# Altium PCB SensorBoardShield_Actuator.PcbDoc (part 2 of 2)
Units mil, origin at the board's own origin, x right, y up, seen from the top; angles counter-clockwise.
Board outline 3258.19 x 2440.94 mil, 4 copper layers (Top Layer, GND, PWR, Bottom Layer), stack 22.373 mil thick; 64 components, 36 nets, 228 pads, 1194 vias.
Unrouted connection lines stored in the file: 70.
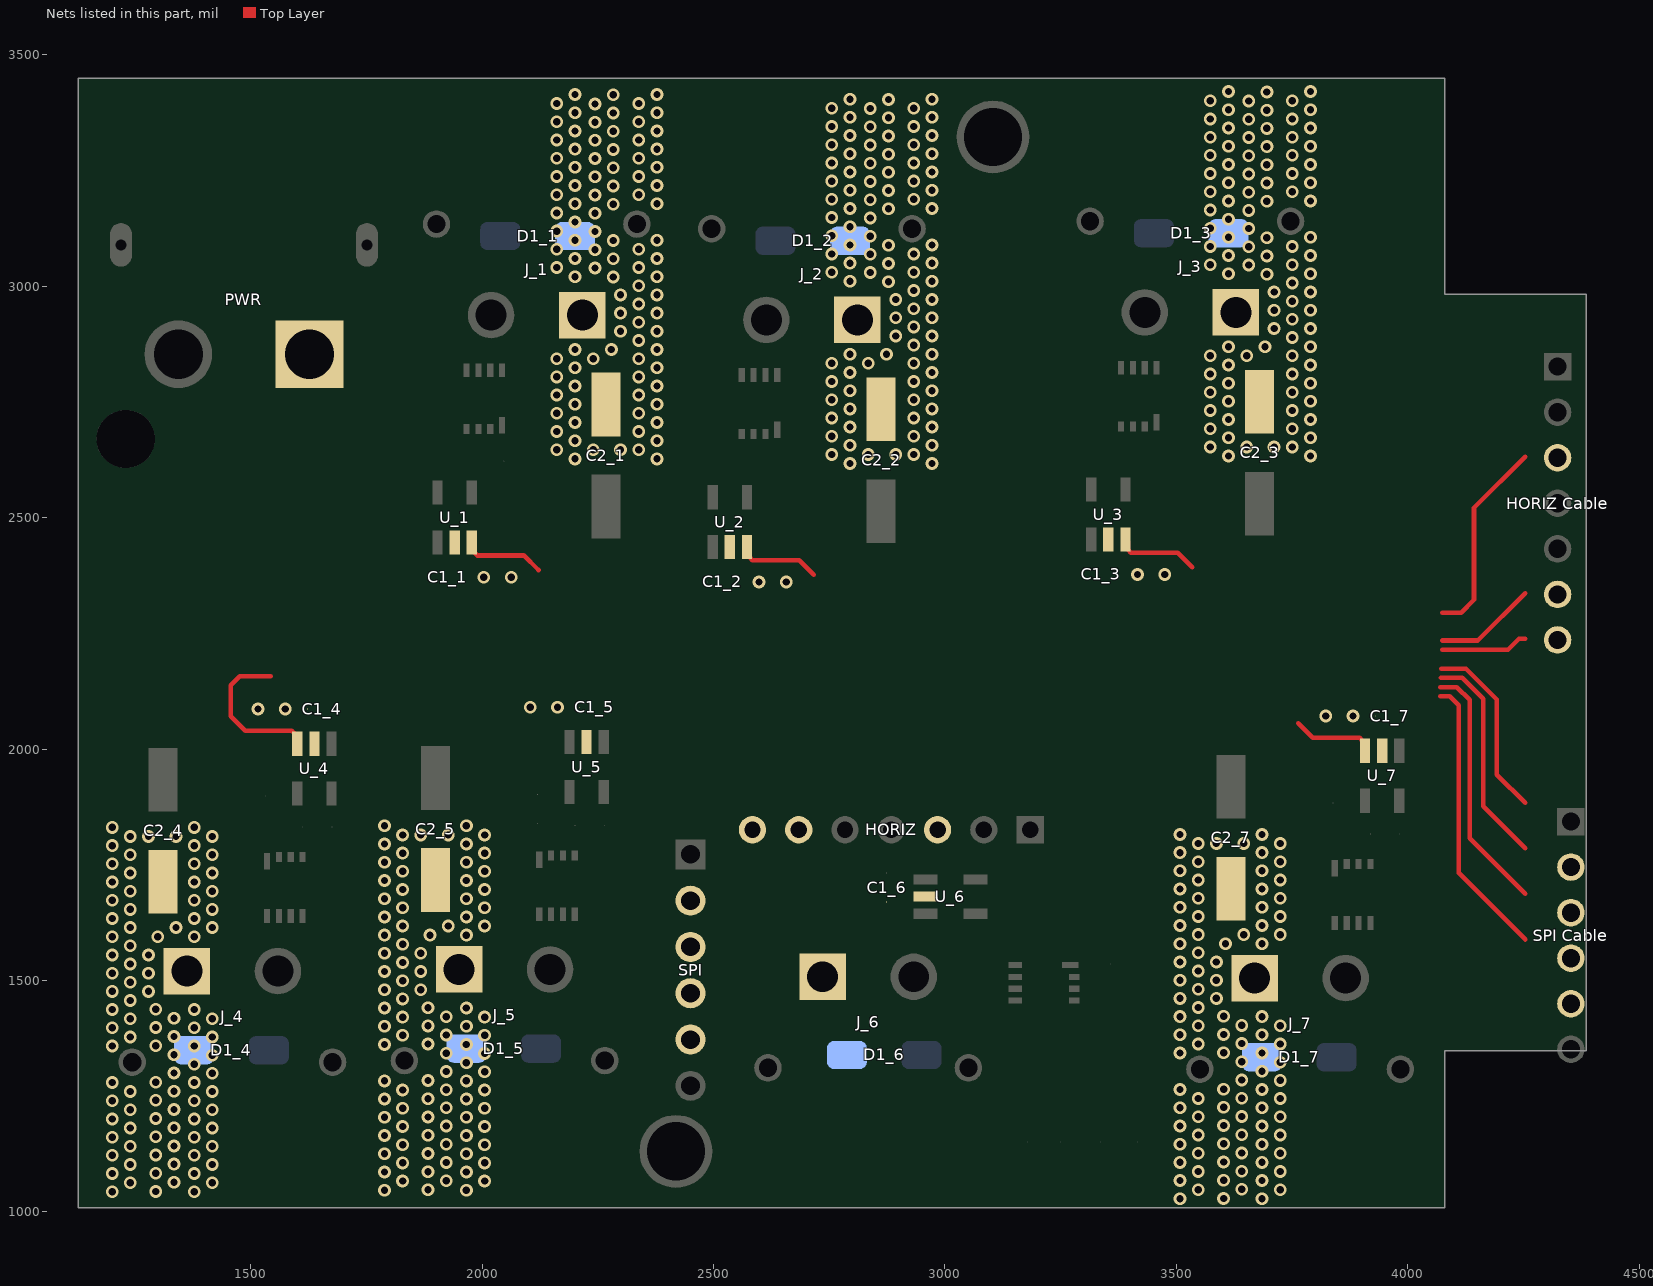
[diagram p3: the nets of this part, all layers, seen from the top]

## Via types
v1: diameter 27.56, hole 15.75, Top Layer to Bottom Layer, 1181 vias
v2: diameter 24, hole 12, Top Layer to Bottom Layer, 13 vias

## Nets (pads, with @x,y where several pads share a name; then routed paths per layer and width w, separated by ;. In a path a pad name is that pad's centre, name@x,y a point inside that pad or via, vN(x,y) a via of type N, cw(c..) or ccw(c..) an arc to the next point about the centre after c; other vN are vias at no path point) (continued)
S2: "HORIZ Cable.6" HORIZ.6 U_7.3 | length 399.5
  Top Layer w10: 3763.94,2055.71 3795.43,2024.21 3896.18,2024.21 3902.04,2018.35 3902.04,2002.32 U_7.3@3908.04,1996.32 ; 4074.8,2234.57 4151.89,2234.57 4253.94,2336.61
S3: "HORIZ Cable.7" HORIZ.7 | length 188.9
  Top Layer w10: 4074.8,2214.57 4216.96,2214.57 4240.58,2238.19 4253.94,2238.19
SCK: "SPI Cable.3" SPI.3 U_2.3 | length 648.6
  Top Layer w10: U_2.3@2572.43,2436.11 2578.43,2430.11 2578.43,2414.08 2584.29,2408.22 2685.04,2408.22 2716.54,2376.72 ; 4072.07,2153.86 4117.8,2153.86 4163.39,2108.27 4163.39,1875.98 4253.94,1785.43
SDI: "SPI Cable.4" SPI.4 U_3.3 | length 721.8
  Top Layer w10: U_3.3@3390.23,2452.38 3396.23,2446.38 3396.23,2430.34 3402.09,2424.49 3502.83,2424.49 3534.33,2392.99 ; 4070.62,2133.86 4106.3,2133.86 4133.86,2106.3 4133.86,1807.09 4253.94,1687.01
SDO: "SPI Cable.5" SPI.5 | length 612.8
  Top Layer w10: 4070.87,2113.86 4070.94,2113.79 4090.94,2113.79 4110.24,2094.49 4110.24,1732.28 4253.94,1588.58
SISI: "SPI Cable.2" SPI.2 U_1.3 | length 574.8
  Top Layer w10: U_1.3@1977.95,2446.2 1983.95,2440.2 1983.95,2424.16 1989.8,2418.31 2090.55,2418.31 2122.05,2386.81 ; 4072.3,2173.86 4126.08,2173.86 4192.91,2107.02 4192.91,1944.88 4253.94,1883.86
TCK: "HORIZ Cable.3" HORIZ.3 U_4.3 | length 775.1
  Top Layer w10: 1543.31,2157.48 1476.38,2157.48 1456.69,2137.8 1456.69,2070.87 1488.19,2039.37 1588.94,2039.37 1594.8,2033.51 1594.8,2017.48 U_4.3@1600.8,2011.48 ; 4074.8,2294.57 4115.43,2294.57 4143.39,2322.52 4143.39,2521.34 4253.94,2631.89
VCC-12V: C1_1.2 C1_2.2 C1_3.2 C1_4.2 C1_5.2 C1_6.2 C1_7.2 C2_1.1 C2_2.1 C2_3.1 C2_4.1 C2_5.1 C2_7.1 D1_1.1 D1_2.1 D1_3.1 D1_4.1 D1_5.1 D1_6.1 D1_7.1 J_1.P J_2.P J_3.P J_4.P J_5.P J_6.P J_7.P PWR.2 U_1.2 U_2.2 U_3.2 U_4.2 U_5.2 U_6. U_7.2
  other v1: 3508.03,1028.15 3685.2,1028.15 3602.38,1028.9 1200.79,1043.31 1377.95,1043.31 1295.13,1044.05 1789.06,1046.75 1883.4,1047.5 1966.22,1046.75 3547.4,1047.83 3724.57,1047.83 3641.75,1048.58 1240.16,1062.99 1417.32,1062.99 1334.5,1063.74 1828.43,1066.44 2005.59,1066.44 1922.77,1067.18 3508.03,1067.52 3602.38,1068.27 3685.2,1067.52 1200.79,1082.68 1295.13,1083.42 1377.95,1082.68 1789.06,1086.12 1966.22,1086.12 1883.4,1086.87 3547.4,1087.2 3724.57,1087.2 3641.75,1087.95 1240.16,1102.36 1417.32,1102.36 1334.5,1103.11 1828.43,1105.81 2005.59,1105.81 1922.77,1106.55 3508.03,1106.89 3685.2,1106.89 3602.38,1107.64 1200.79,1122.05 1377.95,1122.05 1295.13,1122.79 1789.06,1125.49 1966.22,1125.49 1883.4,1126.24 3547.4,1126.57 3641.75,1127.32 3724.57,1126.57 1240.16,1141.73 1334.5,1142.48 1417.32,1141.73 1828.43,1145.18 2005.59,1145.18 1922.77,1145.92 3508.03,1146.26 3685.2,1146.26 3602.38,1147.01 1200.79,1161.42 1377.95,1161.42 1295.13,1162.16 1789.06,1164.86 1966.22,1164.86 1883.4,1165.61 3547.4,1165.94 3724.57,1165.94 3641.75,1166.69 1240.16,1181.1 1417.32,1181.1 1334.5,1181.85 1828.43,1184.55 1922.77,1185.29 2005.59,1184.55 3508.03,1185.63 3602.38,1186.38 3685.2,1185.63 1200.79,1200.79 1377.95,1200.79 1295.13,1201.53 1789.06,1204.23 1966.22,1204.23 1883.4,1204.98 3547.4,1205.31 3724.57,1205.31 3641.75,1206.06 1240.16,1220.47 1417.32,1220.47 1334.5,1221.22 1828.43,1223.92 2005.59,1223.92 1922.77,1224.66 3508.03,1225 3685.2,1225 3602.38,1225.75 1200.79,1240.16 1377.95,1240.16 1295.13,1240.9 1789.06,1243.6 1883.4,1244.35 1966.22,1243.6 3547.4,1244.68 3641.75,1245.43 3724.57,1244.68 1240.16,1259.84 1417.32,1259.84 1334.5,1260.59 1828.43,1263.29 2005.59,1263.29 1922.77,1264.03 3508.03,1264.37 3685.2,1264.37 3602.38,1265.12 1200.79,1279.53 1295.13,1280.27 1377.95,1279.53 1789.06,1282.97 1966.22,1282.97 1883.4,1283.72 3724.57,1284.06 3641.75,1284.8 1417.32,1299.21 1334.5,1299.96 1922.77,1303.4 2005.59,1302.66 3685.2,1303.74 1377.95,1318.9 1966.22,1322.34 3724.57,1323.43 3641.75,1324.17 1334.5,1339.33 1417.32,1338.58 2005.59,1342.03 1922.77,1342.77 3508.03,1343.11 3685.2,1343.11 3602.38,1343.86 1200.79,1358.27 1377.95,1358.27 1295.13,1359.01 1789.06,1361.71 1883.4,1362.46 1966.22,1361.71 3547.4,1362.8 3724.57,1362.8 3641.75,1363.54 1240.16,1377.95 1417.32,1377.95 1334.5,1378.7 1828.43,1381.4 2005.59,1381.4 1922.77,1382.15 3508.03,1382.48 3685.2,1382.48 3602.38,1383.23 1200.79,1397.64 1295.13,1398.38 1377.95,1397.64 1789.06,1401.08 1966.22,1401.08 1883.4,1401.83 3547.4,1402.17 3724.57,1402.17 3641.75,1402.91 1240.16,1417.32 1417.32,1417.32 1334.5,1418.07 1828.43,1420.77 2005.59,1420.77 1922.77,1421.52 3508.03,1421.85 3685.2,1421.85 3602.38,1422.6 1200.79,1437.01 1377.95,1437.01 1295.13,1437.75 1789.06,1440.45 1966.22,1440.45 1883.4,1441.2 3547.4,1441.54 1240.16,1456.69 1828.43,1460.14 3508.03,1461.22 3586.77,1461.22 1200.79,1476.38 1279.53,1476.38 1789.06,1479.82 1867.8,1479.82 3547.4,1480.91 1240.16,1496.06 1828.43,1499.51 3508.03,1500.59 3586.77,1500.59 1200.79,1515.75 1279.53,1515.75 1789.06,1519.19 1867.8,1519.19 3547.4,1520.28 1240.16,1535.43 1828.43,1538.88 3508.03,1539.96 3586.77,1539.96 1200.79,1555.12 1279.53,1555.12 1789.06,1558.56 1867.8,1558.56 3547.4,1559.65 1240.16,1574.8 1828.43,1578.25 3508.03,1579.33 3606.46,1579.33 3685.2,1579.33 1200.79,1594.49 1299.21,1594.49 1377.95,1594.49 1789.06,1597.93 1887.48,1597.93 1966.22,1597.93 3547.4,1599.02 3645.83,1599.02 3724.57,1599.02 1240.16,1614.17 1338.58,1614.17 1417.32,1614.17 1828.43,1617.62 1926.85,1617.62 2005.59,1617.62 3508.03,1618.7 3685.2,1618.7 1200.79,1633.86 1377.95,1633.86 1789.06,1637.3 1966.22,1637.3 3547.4,1638.39 3724.57,1638.39 1240.16,1653.54 1417.32,1653.54 1828.43,1656.99 2005.59,1656.99 3508.03,1658.07 3685.2,1658.07 1200.79,1673.23 1377.95,1673.23 1789.06,1676.67 1966.22,1676.67 3547.4,1677.76 3724.57,1677.76 1240.16,1692.91 1417.32,1692.91 1828.43,1696.36 2005.59,1696.36 3508.03,1697.44 3685.2,1697.44 1200.79,1712.6 1377.95,1712.6 1789.06,1716.04 1966.22,1716.04 3547.4,1717.13 3724.57,1717.13 1240.16,1732.28 1417.32,1732.28 1828.43,1735.73 2005.59,1735.73 3508.03,1736.81 3685.2,1736.81 1200.79,1751.97 1377.95,1751.97 1789.06,1755.41 1966.22,1755.41 3547.4,1756.5 3724.57,1756.5 1240.16,1771.65 1417.32,1771.65 1828.43,1775.1 2005.59,1775.1 3508.03,1776.18 3685.2,1776.18 1200.79,1791.34 1377.95,1791.34 1789.06,1794.78 1966.22,1794.78 3547.4,1795.87 3586.77,1795.87 3645.83,1795.87 3724.57,1795.87 1240.16,1811.02 1279.53,1811.02 1338.58,1811.02 1417.32,1811.02 1828.43,1814.47 1867.8,1814.47 1926.85,1814.47 2005.59,1814.47 3508.03,1815.55 3685.2,1815.55 1200.79,1830.71 1377.95,1830.71 1789.06,1834.15 1966.22,1834.15 3822.99,2071.46 3882.05,2071.46 1515.75,2086.61 1574.8,2086.61 2104.02,2090.06 2163.07,2090.06 2598.43,2360.97 2657.48,2360.97 2003.94,2371.06 2062.99,2371.06 3416.22,2377.24 3475.28,2377.24 2795.28,2616.88 2972.44,2616.88 2200.79,2626.97 2377.95,2626.97 3613.07,2633.15 3790.24,2633.15 2755.91,2636.56 2834.65,2636.56 2893.7,2636.56 2933.07,2636.56 2161.42,2646.65 2240.16,2646.65 2299.21,2646.65 2338.58,2646.65 3573.7,2652.83 3652.44,2652.83 3711.5,2652.83 3750.87,2652.83 2795.28,2656.25 2972.44,2656.25 2200.79,2666.34 2377.95,2666.34 3613.07,2672.52 3790.24,2672.52 2755.91,2675.93 2933.07,2675.93 2161.42,2686.02 2338.58,2686.02 3573.7,2692.2 3750.87,2692.2 2795.28,2695.62 2972.44,2695.62 2200.79,2705.71 2377.95,2705.71 3613.07,2711.89 3790.24,2711.89 2755.91,2715.3 2933.07,2715.3 2161.42,2725.39 2338.58,2725.39 3573.7,2731.57 3750.87,2731.57 2795.28,2734.99 2972.44,2734.99 2200.79,2745.08 2377.95,2745.08 3613.07,2751.26 3790.24,2751.26 2755.91,2754.67 2933.07,2754.67 2161.42,2764.76 2338.58,2764.76 3573.7,2770.94 3750.87,2770.94 2795.28,2774.36 2972.44,2774.36 2200.79,2784.45 2377.95,2784.45 3613.07,2790.63 3790.24,2790.63 2755.91,2794.04 2933.07,2794.04 2161.42,2804.13 2338.58,2804.13 3573.7,2810.31 3750.87,2810.31 2795.28,2813.73 2972.44,2813.73 2200.79,2823.82 2377.95,2823.82 3613.07,2830 3790.24,2830 2755.91,2833.41 2834.65,2833.41 2933.07,2833.41 2161.42,2843.5 2240.16,2843.5 2338.58,2843.5 3573.7,2849.68 3652.44,2849.68 3750.87,2849.68 2795.28,2853.1 2874.02,2853.1 2972.44,2853.1 2200.79,2863.19 2279.53,2863.19 2377.95,2863.19 3613.07,2869.37 3691.81,2869.37 3790.24,2869.37 2933.07,2872.78 2338.58,2882.87 3750.87,2889.05 2893.7,2892.47 2972.44,2892.47 2299.21,2902.56 2377.95,2902.56 3711.5,2908.74 3790.24,2908.74 2933.07,2912.16 2338.58,2922.24 3750.87,2928.42 2893.7,2931.84 2972.44,2931.84 2299.21,2941.93 2377.95,2941.93 3711.5,2948.11 3790.24,2948.11 2933.07,2951.53 2338.58,2961.61 3750.87,2967.79 2893.7,2971.21 2972.44,2971.21 2299.21,2981.3 2377.95,2981.3 3711.5,2987.48 3790.24,2987.48 2933.07,2990.9 2338.58,3000.98 3750.87,3007.16 2878.09,3009.83 2795.28,3010.58 2972.44,3010.58 2283.61,3019.92 2200.79,3020.67 2377.95,3020.67 3695.89,3026.1 3613.07,3026.85 3790.24,3026.85 2755.91,3030.27 2838.72,3029.52 2933.07,3030.27 2161.42,3040.35 2244.24,3039.61 2338.58,3040.35 3656.52,3045.79 3573.7,3046.53 3750.87,3046.53 2878.09,3049.2 2795.28,3049.95 2972.44,3049.95 2283.61,3059.29 2200.79,3060.04 2377.95,3060.04 3695.89,3065.47 3613.07,3066.22 3790.24,3066.22 2838.72,3068.89 2755.91,3069.64 2933.07,3069.64 2244.24,3078.98 2161.42,3079.72 2338.58,3079.72 3656.52,3085.16 3573.7,3085.9 3750.87,3085.9 2795.28,3089.32 2878.09,3088.57 2972.44,3089.32 2200.79,3099.41 2283.61,3098.66 2377.95,3099.41 3695.89,3104.84 3613.07,3105.59 3790.24,3105.59 2838.72,3108.26 2755.91,3109.01 2244.24,3118.35 2161.42,3119.09 3573.7,3125.27 3656.52,3124.53 2795.28,3128.69 2200.79,3138.78 3613.07,3144.96 2755.91,3148.38 2838.72,3147.63 2161.42,3158.46 2244.24,3157.72 3656.52,3163.9 3573.7,3164.64 2878.09,3167.31 2795.28,3168.06 2972.44,3168.06 2283.61,3177.4 2200.79,3178.15 2377.95,3178.15 3613.07,3184.33 3695.89,3183.58 3790.24,3184.33 2838.72,3187 2755.91,3187.75 2933.07,3187.75 2244.24,3197.09 2161.42,3197.83 2338.58,3197.83 3656.52,3203.27 3573.7,3204.01 3750.87,3204.01 2795.28,3207.43 2878.09,3206.68 2972.44,3207.43 2283.61,3216.77 2200.79,3217.52 2377.95,3217.52 3695.89,3222.95 3613.07,3223.7 3790.24,3223.7 2838.72,3226.37 2755.91,3227.12 2933.07,3227.12 2244.24,3236.46 2161.42,3237.2 2338.58,3237.2 3573.7,3243.38 3656.52,3242.64 3750.87,3243.38 2878.09,3246.05 2795.28,3246.8 2972.44,3246.8 2283.61,3256.14 2200.79,3256.89 2377.95,3256.89 3695.89,3262.32 3613.07,3263.07 3790.24,3263.07 2755.91,3266.49 2838.72,3265.74 2933.07,3266.49 2244.24,3275.83 2161.42,3276.57 2338.58,3276.57 3656.52,3282.01 3573.7,3282.75 3750.87,3282.75 2878.09,3285.42 2795.28,3286.17 2972.44,3286.17 2200.79,3296.26 2283.61,3295.51 2377.95,3296.26 3613.07,3302.44 3695.89,3301.69 3790.24,3302.44 2838.72,3305.11 2755.91,3305.86 2933.07,3305.86 2244.24,3315.2 2161.42,3315.95 2338.58,3315.95 3656.52,3321.38 3573.7,3322.12 3750.87,3322.12 2878.09,3324.79 2795.28,3325.54 2972.44,3325.54 2283.61,3334.88 2200.79,3335.63 2377.95,3335.63 3695.89,3341.06 3613.07,3341.81 3790.24,3341.81 2838.72,3344.48 2755.91,3345.23 2933.07,3345.23 2161.42,3355.32 2244.24,3354.57 2338.58,3355.32 3573.7,3361.49 3656.52,3360.75 3750.87,3361.5 2878.09,3364.16 2795.28,3364.91 2972.44,3364.91 2283.61,3374.25 2200.79,3375 2377.95,3375 3695.89,3380.43 3613.07,3381.18 3790.24,3381.18 2838.72,3383.85 2755.91,3384.6 2933.07,3384.6 2244.24,3393.94 2161.42,3394.69 2338.58,3394.69 3656.52,3400.12 3573.7,3400.86 3750.87,3400.87 2795.28,3404.28 2878.09,3403.53 2972.44,3404.28 2200.79,3414.37 2283.61,3413.62 2377.95,3414.37 3695.89,3419.8 3613.07,3420.55 3790.24,3420.55
pads on no net: J_1.S1 J_1.S2 J_2.S1 J_2.S2 J_3.S1 J_3.S2 J_4.S1 J_4.S2 J_5.S1 J_5.S2 J_6.S1 J_6.S2 J_7.S1 J_7.S2 PWR.S1 PWR.S2

## Polygon pours and split planes (outlines as drawn)
GND on Top Layer "GND_L01_P120" (solid, pour order 120): 3020,1660 3230,1660 3230,1585 3020,1585
NetR1_6_1 on Top Layer "NETR1_6_1_L01_P119" (solid, pour order 119): 3385,1765 3385,1675 3020,1675 3020,1765
NetQ_7_4 on Top Layer "NETQ_7_4_L01_P041" (solid, pour order 41): 3763.94,1728.94 3771.81,1721.06 3850.55,1721.06 3850.55,1787.99 3858.43,1795.87 3941.1,1795.87 3941.1,1839.17 3771.81,1839.17 3763.94,1831.3
NetR1_7_1 on Top Layer "NETR1_7_1_L01_P047" (solid, pour order 47): 3966.5,1953.39 3966.5,1795.87 4042.48,1795.87 4042.48,1953.39
GND on Top Layer "GND_L01_P053" (solid, pour order 53): 3922.4,1917.42 3922.4,1852.46 3483.43,1852.46 3483.43,2098.52 3688.15,2098.52 3818.07,1968.6 3866.3,1968.6
GND on Top Layer "GND_L01_P065" (solid, pour order 65): 3968.66,2099.02 3968.66,1969.09 4045.43,1969.09 4045.43,2099.02
GND on Top Layer "GND_L01_P077" (solid, pour order 77): 3952.91,1719.59 3860,1719.59 3860,1780 4045,1780 4044.45,1779.45 4044.45,1618.7 3952.91,1618.7
VCC-12V on Top Layer "VCC-12V_L01_P083" (solid, pour order 83): 3803.31,2099.02 3803.31,2041.44 3919.94,2041.44 3934.21,2027.17 3934.21,1970.57 3956.85,1970.57 3956.85,2099.02
NetR1_7_1 on Top Layer "NETR1_7_1_L01_P089" (solid, pour order 89): 3966.69,1853.44 3933.23,1853.44 3933.23,1922.34 3933.23,1953.35 3966.69,1953.35
VCC-12V on Top Layer "VCC-12V_L01_P101" (solid, pour order 101): 3743.53,1005.02 3487.36,1005.02 3487.36,1831.79 3748.68,1831.79
NetD1_7_2 on Top Layer "NETD1_7_2_L01_P122" (solid, pour order 122): 3765,1010 4025,1010 4025,1610 3935,1610 3935,1705 3765,1705 3935,1705 3765,1705
NetQ_3_4 on Top Layer "NETQ_3_4_L01_P043" (solid, pour order 43): 3534.33,2719.76 3526.46,2727.64 3447.72,2727.64 3447.72,2660.71 3439.84,2652.83 3357.17,2652.83 3357.17,2609.53 3526.46,2609.53 3534.33,2617.4
NetR1_3_1 on Top Layer "NETR1_3_1_L01_P049" (solid, pour order 49): 3331.76,2495.31 3331.76,2652.83 3255.79,2652.83 3255.79,2495.31
GND on Top Layer "GND_L01_P055" (solid, pour order 55): 3375.87,2531.28 3375.87,2596.24 3814.84,2596.24 3814.84,2350.18 3610.12,2350.18 3480.2,2480.1 3431.97,2480.1
GND on Top Layer "GND_L01_P067" (solid, pour order 67): 3329.61,2349.68 3329.61,2479.61 3252.83,2479.61 3252.83,2349.68
GND on Top Layer "GND_L01_P073" (solid, pour order 73): 3253.82,2693.68 3253.82,2664.15 3436.69,2664.15 3436.69,2688.46 3436.69,2731.87 3436.89,2732.07 3253.82,2732.07
GND on Top Layer "GND_L01_P079" (solid, pour order 79): 3345.35,2729.11 3345.35,2830 3253.82,2830 3253.82,2729.11
VCC-12V on Top Layer "VCC-12V_L01_P085" (solid, pour order 85): 3494.96,2349.68 3494.96,2407.26 3378.33,2407.26 3364.05,2421.53 3364.05,2478.13 3341.42,2478.13 3341.42,2349.68
NetR1_3_1 on Top Layer "NETR1_3_1_L01_P091" (solid, pour order 91): 3331.57,2595.26 3365.04,2595.26 3365.04,2526.36 3365.04,2495.35 3331.57,2495.35
VCC-12V on Top Layer "VCC-12V_L01_P103" (solid, pour order 103): 3554.74,3443.68 3810.91,3443.68 3810.91,2616.91 3549.59,2616.91
NetD1_3_2 on Top Layer "NETD1_3_2_L01_P109" (solid, pour order 109): 3345.2,2841.96 3357.17,2830 3357.17,2741.42 3513.93,2741.42 3534.33,2761.82 3534.33,3447.96 3272.31,3447.96 3272.31,2841.96
S1 on Top Layer "S1_L01_P121" (solid, pour order 121): 2985,1650 2920,1650 2850,1580 2985,1580
VCC-12V on Top Layer "VCC-12V_L01_P118" (solid, pour order 118): 2620,1765 2820,1765 2820,1690 2985,1690 2985,1665 2920,1665 2895,1640 2825,1570 2825,1370 2725,1370 2620,1475
GND on Top Layer "GND_L01_P117" (solid, pour order 117): 2985,1765 2985,1700 2835,1700 2835,1765
NetD1_6_2 on Top Layer "NETD1_6_2_L01_P116" (solid, pour order 116): 2795,1185 2730,1250 2730,1350 2850,1350 2850,1570 3210,1570 3210,1185
NetQ_6_4 on Top Layer "NETQ_6_4_L01_P115" (solid, pour order 115): 3390,1660 3390,1525 3250,1525 3250,1660
GND on Top Layer "GND_L01_P114" (solid, pour order 114): 3390,1180 3370,1160 3370,1130 3225,1130 3225,1365 3250,1390 3250,1505 3390,1505
NetD1_2_2 on Top Layer "NETD1_2_2_L01_P109" (solid, pour order 109): 2527.41,2825.69 2539.37,2813.73 2539.37,2725.15 2696.13,2725.15 2716.54,2745.55 2716.54,3431.69 2454.51,3431.69 2454.51,2825.69
VCC-12V on Top Layer "VCC-12V_L01_P103" (solid, pour order 103): 2736.94,3427.41 2993.11,3427.41 2993.11,2600.64 2731.79,2600.64
NetR1_2_1 on Top Layer "NETR1_2_1_L01_P091" (solid, pour order 91): 2513.78,2578.99 2547.24,2578.99 2547.24,2510.09 2547.24,2479.08 2513.78,2479.08
VCC-12V on Top Layer "VCC-12V_L01_P085" (solid, pour order 85): 2677.17,2333.41 2677.17,2390.99 2560.53,2390.99 2546.26,2405.27 2546.26,2461.86 2523.62,2461.86 2523.62,2333.41
GND on Top Layer "GND_L01_P079" (solid, pour order 79): 2527.56,2712.84 2527.56,2813.73 2436.02,2813.73 2436.02,2712.84
GND on Top Layer "GND_L01_P073" (solid, pour order 73): 2436.02,2677.41 2436.02,2647.88 2618.9,2647.88 2618.9,2672.2 2618.9,2715.6 2619.09,2715.8 2436.02,2715.8
GND on Top Layer "GND_L01_P067" (solid, pour order 67): 2511.81,2333.41 2511.81,2463.34 2435.04,2463.34 2435.04,2333.41
GND on Top Layer "GND_L01_P055" (solid, pour order 55): 2558.07,2515.01 2558.07,2579.97 2997.05,2579.97 2997.05,2333.91 2792.32,2333.91 2662.4,2463.83 2614.17,2463.83
NetR1_2_1 on Top Layer "NETR1_2_1_L01_P049" (solid, pour order 49): 2513.97,2479.04 2513.97,2636.56 2437.99,2636.56 2437.99,2479.04
NetQ_2_4 on Top Layer "NETQ_2_4_L01_P043" (solid, pour order 43): 2716.54,2703.49 2708.66,2711.37 2629.92,2711.37 2629.92,2644.44 2622.05,2636.56 2539.37,2636.56 2539.37,2593.26 2708.66,2593.26 2716.54,2601.13
NetD1_1_2 on Top Layer "NETD1_1_2_L01_P108" (solid, pour order 108): 1932.92,2835.78 1944.88,2823.82 1944.88,2735.24 2101.64,2735.24 2122.05,2755.64 2122.05,3441.78 1860.02,3441.78 1860.02,2835.78
VCC-12V on Top Layer "VCC-12V_L01_P102" (solid, pour order 102): 2142.46,3437.5 2398.62,3437.5 2398.62,2610.73 2137.3,2610.73
NetR1_1_1 on Top Layer "NETR1_1_1_L01_P090" (solid, pour order 90): 1919.29,2589.08 1952.76,2589.08 1952.76,2520.18 1952.76,2489.17 1919.29,2489.17
VCC-12V on Top Layer "VCC-12V_L01_P084" (solid, pour order 84): 2082.68,2343.5 2082.68,2401.08 1966.04,2401.08 1951.77,2415.35 1951.77,2471.95 1929.13,2471.95 1929.13,2343.5
GND on Top Layer "GND_L01_P078" (solid, pour order 78): 1933.07,2722.93 1933.07,2823.82 1841.54,2823.82 1841.54,2722.93
GND on Top Layer "GND_L01_P072" (solid, pour order 72): 1841.54,2687.5 1841.54,2657.97 2024.41,2657.97 2024.41,2682.28 2024.41,2725.69 2024.61,2725.89 1841.54,2725.89
GND on Top Layer "GND_L01_P066" (solid, pour order 66): 1917.32,2343.5 1917.32,2473.43 1840.55,2473.43 1840.55,2343.5
GND on Top Layer "GND_L01_P054" (solid, pour order 54): 1963.58,2525.1 1963.58,2590.06 2402.56,2590.06 2402.56,2344 2197.83,2344 2067.91,2473.92 2019.68,2473.92
NetR1_1_1 on Top Layer "NETR1_1_1_L01_P048" (solid, pour order 48): 1919.48,2489.13 1919.48,2646.65 1843.5,2646.65 1843.5,2489.13
NetQ_1_4 on Top Layer "NETQ_1_4_L01_P042" (solid, pour order 42): 2122.05,2713.58 2114.17,2721.46 2035.43,2721.46 2035.43,2654.53 2027.56,2646.65 1944.88,2646.65 1944.88,2603.35 2114.17,2603.35 2122.05,2611.22
NetR1_5_1 on Top Layer "NETR1_5_1_L01_P047" (solid, pour order 47): 2247.53,1971.99 2247.53,1814.47 2323.5,1814.47 2323.5,1971.99
GND on Top Layer "GND_L01_P065" (solid, pour order 65): 2249.69,2117.62 2249.69,1987.7 2326.46,1987.7 2326.46,2117.62
GND on Top Layer "GND_L01_P071" (solid, pour order 71): 2325.47,1773.62 2325.47,1803.15 2142.6,1803.15 2142.6,1778.84 2142.6,1735.43 2142.4,1735.24 2325.47,1735.24
VCC-12V on Top Layer "VCC-12V_L01_P083" (solid, pour order 83): 2084.33,2117.62 2084.33,2060.04 2200.97,2060.04 2215.24,2045.77 2215.24,1989.17 2237.87,1989.17 2237.87,2117.62
NetR1_5_1 on Top Layer "NETR1_5_1_L01_P089" (solid, pour order 89): 2247.72,1872.05 2214.25,1872.05 2214.25,1940.95 2214.25,1971.95 2247.72,1971.95
GND on Top Layer "GND_L01_P053" (solid, pour order 53): 2203.43,1936.02 2203.43,1871.06 1764.45,1871.06 1764.45,2117.13 1969.17,2117.13 2099.1,1987.2 2147.32,1987.2
GND on Top Layer "GND_L01_P077" (solid, pour order 77): 2233.94,1738.19 2233.94,1637.3 2325.47,1637.3 2325.47,1738.19
NetQ_5_4 on Top Layer "NETQ_5_4_L01_P041" (solid, pour order 41): 2044.96,1747.54 2052.84,1739.67 2131.58,1739.67 2131.58,1806.6 2139.45,1814.47 2222.13,1814.47 2222.13,1857.78 2052.84,1857.78 2044.96,1849.9
VCC-12V on Top Layer "VCC-12V_L01_P101" (solid, pour order 101): 2024.55,1023.62 1768.39,1023.62 1768.39,1850.39 2029.7,1850.39
NetD1_5_2 on Top Layer "NETD1_5_2_L01_P107" (solid, pour order 107): 2234.09,1625.34 2222.13,1637.3 2222.13,1725.89 2065.37,1725.89 2044.96,1705.48 2044.96,1019.34 2306.98,1019.34 2306.98,1625.34
NetD1_4_2 on Top Layer "NETD1_4_2_L01_P106" (solid, pour order 106): 1645.82,1621.9 1633.86,1633.86 1633.86,1722.44 1477.1,1722.44 1456.69,1702.04 1456.69,1015.9 1718.72,1015.9 1718.72,1621.9
VCC-12V on Top Layer "VCC-12V_L01_P100" (solid, pour order 100): 1436.28,1020.18 1180.12,1020.18 1180.12,1846.95 1441.44,1846.95
NetQ_4_4 on Top Layer "NETQ_4_4_L01_P040" (solid, pour order 40): 1456.69,1744.09 1464.57,1736.22 1543.31,1736.22 1543.31,1803.15 1551.18,1811.02 1633.86,1811.02 1633.86,1854.33 1464.57,1854.33 1456.69,1846.46
VCC-12V on Top Layer "VCC-12V_L01_P082" (solid, pour order 82): 1496.06,2114.17 1496.06,2056.59 1612.7,2056.59 1626.97,2042.32 1626.97,1985.73 1649.61,1985.73 1649.61,2114.17
GND on Top Layer "GND_L01_P064" (solid, pour order 64): 1661.42,2114.17 1661.42,1984.25 1738.19,1984.25 1738.19,2114.17
NetR1_4_1 on Top Layer "NETR1_4_1_L01_P088" (solid, pour order 88): 1659.45,1868.6 1625.98,1868.6 1625.98,1937.5 1625.98,1968.5 1659.45,1968.5
GND on Top Layer "GND_L01_P076" (solid, pour order 76): 1645.67,1734.74 1645.67,1633.86 1737.2,1633.86 1737.2,1734.74
GND on Top Layer "GND_L01_P070" (solid, pour order 70): 1737.2,1770.18 1737.2,1799.7 1554.33,1799.7 1554.33,1775.39 1554.33,1731.99 1554.13,1731.79 1737.2,1731.79
NetR1_4_1 on Top Layer "NETR1_4_1_L01_P046" (solid, pour order 46): 1659.26,1968.55 1659.26,1811.02 1735.24,1811.02 1735.24,1968.55
GND on Top Layer "GND_L01_P052" (solid, pour order 52): 1615.16,1932.58 1615.16,1867.62 1176.18,1867.62 1176.18,2113.68 1380.91,2113.68 1510.83,1983.76 1559.06,1983.76
NetD1_7_2 on Bottom Layer "NETD1_7_2_L04_P035" (solid, pour order 35): 3953.06,1606.74 3941.1,1618.7 3941.1,1707.28 3784.34,1707.28 3763.94,1686.88 3763.94,1000.74 4025.96,1000.74 4025.96,1606.74
VCC-12V on Bottom Layer "VCC-12V_L04_P059" (solid, pour order 59): 3743.53,1005.02 3487.36,1005.02 3487.36,1831.79 3748.68,1831.79
NetD1_3_2 on Bottom Layer "NETD1_3_2_L04_P037" (solid, pour order 37): 3345.2,2841.96 3357.17,2830 3357.17,2741.42 3513.93,2741.42 3534.33,2761.82 3534.33,3447.96 3272.31,3447.96 3272.31,2841.96
VCC-12V on Bottom Layer "VCC-12V_L04_P061" (solid, pour order 61): 3554.74,3443.68 3810.91,3443.68 3810.91,2616.91 3549.59,2616.91
VCC-12V on Bottom Layer "VCC-12V_L04_P061" (solid, pour order 61): 2736.94,3427.41 2993.11,3427.41 2993.11,2600.64 2731.79,2600.64
NetD1_2_2 on Bottom Layer "NETD1_2_2_L04_P037" (solid, pour order 37): 2527.41,2825.69 2539.37,2813.73 2539.37,2725.15 2696.13,2725.15 2716.54,2745.55 2716.54,3431.69 2454.51,3431.69 2454.51,2825.69
VCC-12V on Bottom Layer "VCC-12V_L04_P060" (solid, pour order 60): 2142.46,3437.5 2398.62,3437.5 2398.62,2610.73 2137.3,2610.73
NetD1_1_2 on Bottom Layer "NETD1_1_2_L04_P036" (solid, pour order 36): 1932.92,2835.78 1944.88,2823.82 1944.88,2735.24 2101.64,2735.24 2122.05,2755.64 2122.05,3441.78 1860.02,3441.78 1860.02,2835.78
VCC-12V on Bottom Layer "VCC-12V_L04_P059" (solid, pour order 59): 2024.55,1023.62 1768.39,1023.62 1768.39,1850.39 2029.7,1850.39
NetD1_5_2 on Bottom Layer "NETD1_5_2_L04_P035" (solid, pour order 35): 2234.09,1625.34 2222.13,1637.3 2222.13,1725.89 2065.37,1725.89 2044.96,1705.48 2044.96,1019.34 2306.98,1019.34 2306.98,1625.34
NetD1_4_2 on Bottom Layer "NETD1_4_2_L04_P034" (solid, pour order 34): 1645.82,1621.9 1633.86,1633.86 1633.86,1722.44 1477.1,1722.44 1456.69,1702.04 1456.69,1015.9 1718.72,1015.9 1718.72,1621.9
VCC-12V on Bottom Layer "VCC-12V_L04_P058" (solid, pour order 58): 1436.28,1020.18 1180.12,1020.18 1180.12,1846.95 1441.44,1846.95
VCC-12V on PWR "VCC-12V_L03_P095" (solid, pour order 95): 3471.61,2102.95 3474.57,2100 4045.43,2100 4045.43,1013.39 4040.51,1008.46 4038.54,1010.43 3472.6,1010.43
VCC-12V on PWR "VCC-12V_L03_P097" (solid, pour order 97): 3826.65,2345.75 3823.7,2348.7 3252.83,2348.7 3252.83,3435.31 3257.76,3440.24 3259.72,3438.27 3825.67,3438.27
VCC-12V on PWR "VCC-12V_L03_P097" (solid, pour order 97): 3008.86,2329.48 3005.91,2332.43 2435.04,2332.43 2435.04,3419.04 2439.96,3423.97 2441.93,3422 3007.87,3422
VCC-12V on PWR "VCC-12V_L03_P096" (solid, pour order 96): 2414.37,2339.57 2411.42,2342.52 1840.55,2342.52 1840.55,3429.13 1845.47,3434.06 1847.44,3432.09 2413.39,3432.09
VCC-12V on PWR "VCC-12V_L03_P095" (solid, pour order 95): 1752.64,2121.56 1755.59,2118.6 2326.46,2118.6 2326.46,1031.99 2321.54,1027.07 2319.57,1029.04 1753.62,1029.04
VCC-12V on PWR "VCC-12V_L03_P094" (solid, pour order 94): 1164.37,2118.11 1167.32,2115.16 1738.19,2115.16 1738.19,1028.54 1733.27,1023.62 1731.3,1025.59 1165.35,1025.59

## Keep-outs
Keep-Out Layer:
  lines w10: 4080.71,1008.58 1127.64,1008.58 1127.64,3449.53 4080.71,3449.53 4080.71,2982.28 4385.83,2982.28 4385.83,1348.43 4080.71,1348.43 ; 4389.76,3449.53 4389.76,3449.53

## Silkscreen, mask and mechanical layers (free items; w line width, h text height)
Top Overlay:
  lines w10: 4081.69,1362.2 4081.69,2976.38

## Text inside footprints (layer, text, board x,y; h text height)
C2_1: Top Overlay "+" at 2287.4,2825 h30 r90
C2_2: Top Overlay "+" at 2881.89,2814.91 h30 r90
C2_3: Top Overlay "+" at 3699.68,2831.18 h30 r90
C2_4: Top Overlay "+" at 1291.34,1632.68 h30 r270
C2_5: Top Overlay "+" at 1879.61,1636.12 h30 r270
C2_7: Top Overlay "+" at 3663.54,1623.42 h30 r270